# EAGLE board PCA9548A QT Board (EAGLE 9.6.2)
REV: A
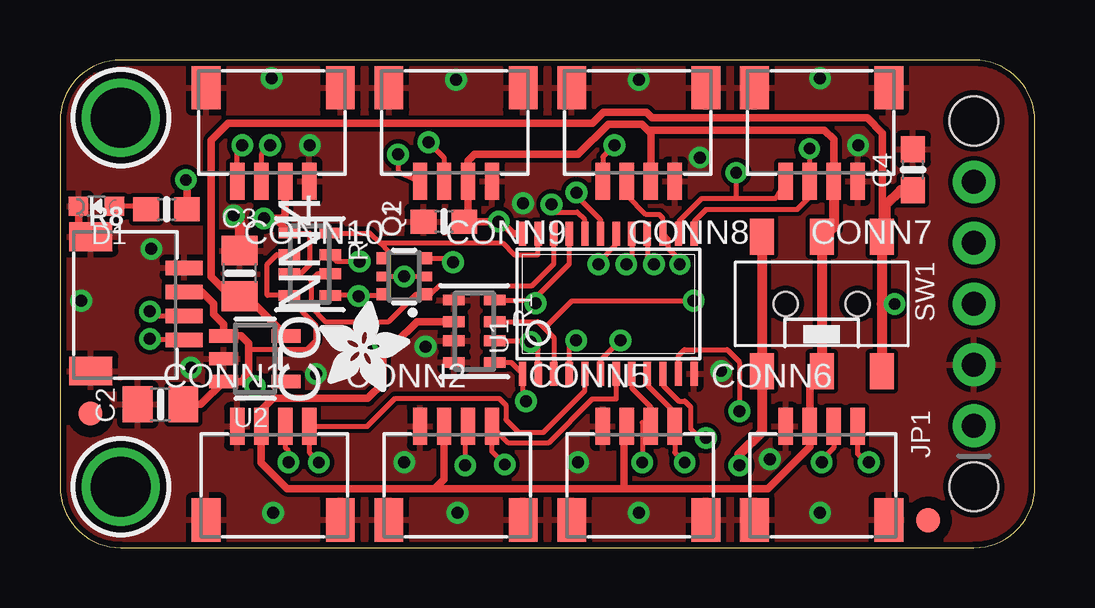
[diagram p0: board, top side]
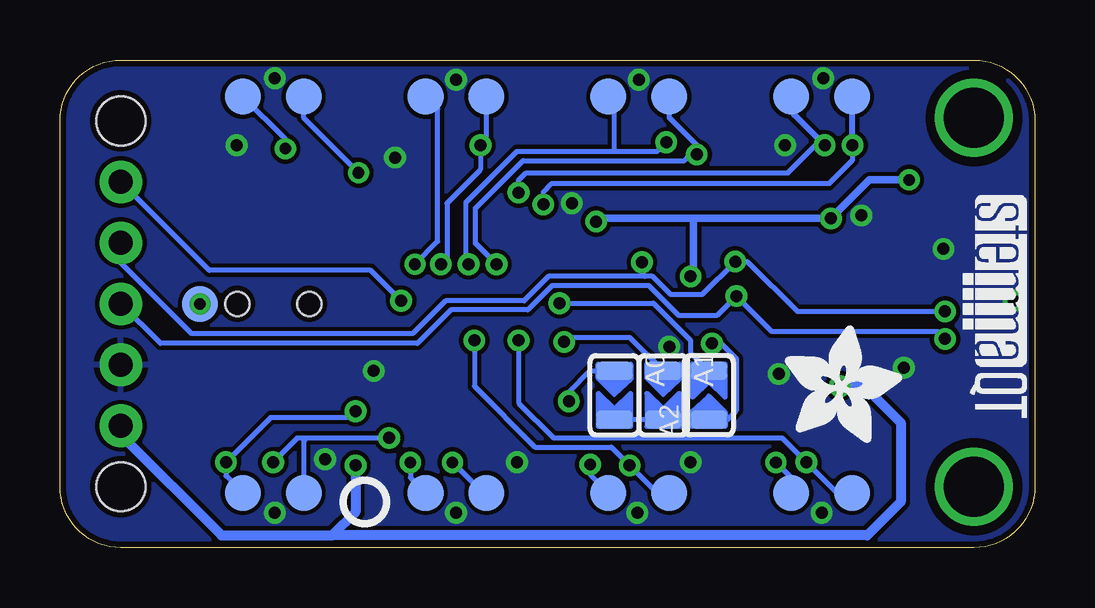
[diagram p1: board, bottom side, seen from below]

Size 40.64 x 20.32 mm. Coordinates in mm from the lower left corner, seen from the top.
Outline: 0,17.78 0,2.54 arc90 2.54,0 38.1,0 arc90 40.64,2.54 40.64,17.78 arc90 38.1,20.32 2.54,20.32 arc90 0,17.78
Copper layers (1*16): Top 0.035mm / dielectric 1.5mm / Bottom 0.035mm
Design rules "adafruit 7-7": minimum track width 7mil, minimum drill 15.5mil, track to track 7mil, track to pad 7mil, pad to pad 7mil, via to via 7mil, smd to smd 7mil, copper to edge 10mil, drill to drill 8mil, minimum pad ring 7mil, minimum via ring 8mil, stop-mask expansion 2mil, vias tented up to drill 20mil, thermal gap 10mil
Net classes: 1 highpower: width 0.305 mm, drill 0.483 mm; 2 lowpower: width 0.254 mm, drill 0.483 mm
Holes 2.03 mm at 38.1,17.78 38.1,2.54

## Footprints (pad centres in the part's own frame; a part is rotated, then mirrored left to right if it is on the bottom)
SOLDERJUMPER_ARROW_NOPASTE = smd 0.762 x 1.524: 1 -1.016,0; 2 1.016,0
0603-NO = smd 1.075 x 1: 1 -0.85,0; 2 0.85,0
0805-NO = smd 1.24 x 1.5: 1 -0.95,0; 2 0.95,0
JST_SH4 = smd 0.6 x 1.55: 1 -1.5,2.006; 2 -0.5,2.006; 3 0.5,2.006; 4 1.5,2.006 | smd 1.2 x 1.8: MT1 -2.8,-1.894; MT2 2.8,-1.894
CHIPLED_0603_NOOUTLINE = smd 0.8 x 0.8: A 0,-0.75; C 0,0.75
FIDUCIAL_1MM = smd 1 x 1: 1 0,0
1X05_ROUND_70 = drill 1 pad 1.778: 1 -5.08,0; 2 -2.54,0; 3 0,0; 4 2.54,0; 5 5.08,0
SOT363 = smd 0.5 x 0.5: 1 -0.75,-0.9; 3 0.75,-0.9; 4 0.75,0.9; 6 -0.75,0.9 | smd 0.4 x 0.5: 2 0,-0.9; 5 0,0.9
RESPACK_4X0603 = smd 0.45 x 0.9: 1 -1.3,-0.85; 2 -0.4,-0.85; 3 0.4,-0.85; 4 1.3,-0.85; 5 1.3,0.85; 6 0.4,0.85; 7 -0.4,0.85; 8 -1.3,0.85
EG1390 = smd 1 x 1.5: O1 -2.5,2.8; O2 -2.5,-2.8; P1 0,2.8; P2 0,-2.8; S1 2.5,2.8; S2 2.5,-2.8 | hole 1: 1.5,0; -1.5,0
TESTPOINT_ROUND_1.5MM_NO = smd 1.5 x 1.5: P$1 0,0
TSSOP24 = smd 0.305 x 0.991: 1 -3.575,-2.918; 2 -2.925,-2.918; 3 -2.275,-2.918; 4 -1.625,-2.918; 5 -0.975,-2.918; 6 -0.325,-2.918; 7 0.325,-2.918; 8 0.975,-2.918; 9 1.625,-2.918; 10 2.275,-2.918; 11 2.925,-2.918; 12 3.575,-2.918; 13 3.575,2.918; 14 2.925,2.918; 15 2.275,2.918; 16 1.625,2.918; 17 0.975,2.918; 18 0.325,2.918; 19 -0.325,2.918; 20 -0.975,2.918; 21 -1.625,2.918; 22 -2.275,2.918; 23 -2.925,2.918; 24 -3.575,2.918
SOT23-5 = smd 0.55 x 1.2: 1 -0.95,-1.3; 2 0,-1.3; 3 0.95,-1.3; 4 0.95,1.3; 5 -0.95,1.3
MOUNTINGHOLE_2.5_PLATED = drill 2.5 pad 3.2: P$1 0,0

## Placement (x,y rotation side)
A0  [SOLDERJUMPER_ARROW_NOPASTE]  17.53,6.35 270 bottom
A1  [SOLDERJUMPER_ARROW_NOPASTE]  15.49,6.35 270 bottom
A2  [SOLDERJUMPER_ARROW_NOPASTE]  13.59,6.35 90 bottom
C1  1uF  [0603-NO]  16,13.59 180 top
C2  10uF  [0805-NO]  4.19,5.97 180 top
C3  10uF  [0805-NO]  7.49,11.43 90 top
C4  0.1uF  [0603-NO]  35.56,15.75 90 top
CONN1  STEMMA_I2C_QT  [JST_SH4]  8.89,3.05 0 top
CONN2  STEMMA_I2C_QT  [JST_SH4]  16.51,3.05 0 top
CONN4  STEMMA_I2C_QT  [JST_SH4]  3.17,10.16 270 top
CONN5  STEMMA_I2C_QT  [JST_SH4]  24.13,3.05 0 top
CONN6  STEMMA_I2C_QT  [JST_SH4]  31.75,3.05 0 top
CONN7  STEMMA_I2C_QT  [JST_SH4]  31.75,17.27 180 top
CONN8  STEMMA_I2C_QT  [JST_SH4]  24.13,17.27 180 top
CONN9  STEMMA_I2C_QT  [JST_SH4]  16.51,17.27 180 top
CONN10  STEMMA_I2C_QT  [JST_SH4]  8.89,17.27 180 top
D1  GREEN  [CHIPLED_0603_NOOUTLINE]  1.52,14.22 90 top
FID2  FIDUCIAL_1MM  [FIDUCIAL_1MM]  1.27,5.59 0 top
FID4  FIDUCIAL_1MM  [FIDUCIAL_1MM]  36.2,1.14 0 top
JP1  [1X05_ROUND_70]  38.1,10.16 90 top
PLABEL0  [PLABEL0]  39.75,5.08 90 top
PLABEL1  [PLABEL1]  39.88,7.62 90 top
PLABEL2  [PLABEL2]  39.75,9.91 90 top
PLABEL3  [PLABEL3]  39.75,12.7 90 top
PLABEL4  [PLABEL4]  39.75,15.75 90 top
PLABEL5  [PLABEL5]  0.19,14.99 0 top
PLABEL6  [PLABEL6]  30.48,13.08 90 top
PLABEL7  [PLABEL7]  33.02,13.08 90 top
PLABEL8  [PLABEL8]  11.56,14.73 0 top
PLABEL9  [PLABEL9]  14.1,14.73 0 top
PLABEL10  [PLABEL10]  26.8,14.73 0 top
PLABEL11  [PLABEL11]  29.08,14.73 0 top
PLABEL12  [PLABEL12]  11.56,5.71 0 top
PLABEL13  [PLABEL13]  14.22,5.71 0 top
PLABEL14  [PLABEL14]  26.92,5.59 0 top
PLABEL15  [PLABEL15]  29.34,5.59 0 top
PLABEL16  [PLABEL16]  30.48,7.3 90 top
PLABEL17  [PLABEL17]  33.02,7.24 90 top
PLABEL18  [PLABEL18]  27.3,10.16 90 top
PLABEL19  [PLABEL19]  36.2,10.16 90 top
PLABEL20  [PLABEL20]  18.48,8.19 0 bottom
PLABEL21  [PLABEL21]  16.32,8.19 0 bottom
PLABEL22  [PLABEL22]  14.48,8.19 0 bottom
PLABEL23  [PLABEL23]  27.94,6.1 0 bottom
PLABEL24  [PLABEL24]  20.26,14.35 0 bottom
Q2  BSS138  [SOT363]  14.35,11.3 90 top
R1  10K Pack  [RESPACK_4X0603]  17.27,9.02 270 top
R7  10K Pack  [RESPACK_4X0603]  10.41,11.81 270 top
R8  10K  [0603-NO]  4.45,14.1 180 top
SW1  AYZ0202AGRLC  [EG1390]  31.75,10.16 180 top
TP1  [TESTPOINT_ROUND_1.5MM_NO]  7.62,18.8 0 bottom
TP2  [TESTPOINT_ROUND_1.5MM_NO]  10.16,18.8 0 bottom
TP3  [TESTPOINT_ROUND_1.5MM_NO]  15.24,18.8 0 bottom
TP4  [TESTPOINT_ROUND_1.5MM_NO]  17.78,18.8 0 bottom
TP5  [TESTPOINT_ROUND_1.5MM_NO]  22.86,18.8 0 bottom
TP6  [TESTPOINT_ROUND_1.5MM_NO]  25.4,18.8 0 bottom
TP7  [TESTPOINT_ROUND_1.5MM_NO]  33.02,18.8 0 bottom
TP8  [TESTPOINT_ROUND_1.5MM_NO]  30.48,18.8 0 bottom
TP9  [TESTPOINT_ROUND_1.5MM_NO]  33.02,2.29 90 bottom
TP10  [TESTPOINT_ROUND_1.5MM_NO]  30.48,2.29 90 bottom
TP11  [TESTPOINT_ROUND_1.5MM_NO]  25.4,2.29 90 bottom
TP12  [TESTPOINT_ROUND_1.5MM_NO]  22.86,2.29 90 bottom
TP13  [TESTPOINT_ROUND_1.5MM_NO]  17.78,2.29 90 bottom
TP14  [TESTPOINT_ROUND_1.5MM_NO]  15.24,2.29 90 bottom
TP15  [TESTPOINT_ROUND_1.5MM_NO]  10.16,2.29 90 bottom
TP16  [TESTPOINT_ROUND_1.5MM_NO]  7.62,2.29 90 bottom
TP17  [TESTPOINT_ROUND_1.5MM_NO]  34.8,10.16 0 bottom
U1  xCA9548APWR  [TSSOP24]  22.86,10.16 0 top
U2  AP2112K-3.3  [SOT23-5]  8.13,7.87 270 top
U$5  [ADAFRUIT_5MM]  10.41,4.38 0 bottom
U$19  MOUNTINGHOLE2.5  [MOUNTINGHOLE_2.5_PLATED]  2.54,17.91 0 top
U$22  MOUNTINGHOLE2.5  [MOUNTINGHOLE_2.5_PLATED]  2.54,2.54 0 top
U$28  [ADAFRUIT_3.5MM]  10.79,6.48 0 top
U$29  [PCBFEAT-REV-040]  27.94,1.91 0 bottom
U$31  [STEMMAQT]  2.98,14.67 270 bottom

## Library data of the parts
A0 A1 A2 FID2 FID4 = microbuilder; BOM: EXCLUDE
C1-C4 JP1 R1 R7 R8 TP1-TP17 U1 U$5 U$28 U$29 = microbuilder
CONN1 CONN2 CONN4-CONN10 = adafruit_electromech; LCSC: C2845363
D1 = microbuilder; ROT: 270
PLABEL0 PLABEL1-PLABEL24 = pinguin
Q2 = microbuilder; JLC_ROTATION: 270
SW1 = adafruit_electromech; LCSC: C2837066
U2 = adafruit_power; JLC_ROTATION: 0
U$19 U$22 = adafruit_electromech; BOM: EXCLUDE
U$31 = silks

## Nets
0SCL: CONN1.4 TP15.P$1 U1.5
0SDA: CONN1.3 TP16.P$1 U1.4
1SCL: CONN2.4 TP13.P$1 U1.7
1SDA: CONN2.3 TP14.P$1 U1.6
2SCL: CONN5.4 TP11.P$1 U1.9
2SDA: CONN5.3 TP12.P$1 U1.8
3.3V [lowpower]: C3.1 C4.1 SW1.O1 SW1.O2 TP17.P$1 U2.5
3SCL: CONN6.4 TP9.P$1 U1.11
3SDA: CONN6.3 TP10.P$1 U1.10
4SCL: CONN7.4 TP8.P$1 U1.14
4SDA: CONN7.3 TP7.P$1 U1.13
5SCL: CONN8.4 TP5.P$1 U1.16
5SDA: CONN8.3 TP6.P$1 U1.15
6SCL: CONN9.4 TP3.P$1 U1.18
6SDA: CONN9.3 TP4.P$1 U1.17
7SCL: CONN10.4 TP1.P$1 U1.20
7SDA: CONN10.3 TP2.P$1 U1.19
A0: A0.1 R1.5 U1.1
A1: A1.1 R1.6 U1.2
A2: A2.2 R1.8 U1.21
GND: C1.2 C2.2 C3.2 C4.2 CONN1.1 CONN1.MT1 CONN1.MT2 CONN2.1 CONN2.MT1 CONN2.MT2 CONN4.1 CONN4.MT1 CONN4.MT2 CONN5.1 CONN5.MT1 CONN5.MT2 CONN6.1 CONN6.MT1 CONN6.MT2 CONN7.1 CONN7.MT1 CONN7.MT2 CONN8.1 CONN8.MT1 CONN8.MT2 CONN9.1 CONN9.MT1 CONN9.MT2 CONN10.1 CONN10.MT1 CONN10.MT2 D1.C JP1.2 R1.1 R1.3 R1.4 U1.12 U2.2
N$1: D1.A R8.2
RESET: JP1.5 R1.7 U1.3
SCL: CONN4.4 JP1.3 Q2.6 R7.5
SCL_IO: Q2.1 R7.6 U1.22
SDA: CONN4.3 JP1.4 Q2.3 R7.7
SDA_IO: Q2.4 R7.8 U1.23
VCC: C2.1 CONN4.2 JP1.1 R7.2 R7.4 SW1.S1 SW1.S2 U2.1 U2.3
VCCIO: A0.2 A1.2 A2.1 C1.1 CONN1.2 CONN2.2 CONN5.2 CONN6.2 CONN7.2 CONN8.2 CONN9.2 CONN10.2 Q2.2 Q2.5 R1.2 R7.1 R7.3 R8.1 SW1.P1 SW1.P2 U1.24

## Tracks (layer width: path | path; a pad name or v marks a point on that pad's centre or on a via)
0SCL  (via drill 0.48)
  Top 0.203: U1.5 21.89,6.53 20.15,4.8 19.12,4.8 18.59,5.33 18.59,5.95 18.31,6.22 13.97,6.22 12.8,5.05 10.41,5.05 | CONN1.4 10.41,5.05 | v10.79,3.56 10.41,3.94 10.41,5.05
  Bottom 0.203: TP15.P$1 10.16,2.92 v10.79,3.56
0SDA  (via drill 0.5)
  Top 0.203: U1.4 21.23,8.35 v21.52,8.64 | v9.53,3.56 9.53,4.03 9.39,4.17 CONN1.3
  Bottom 0.203: v21.52,8.64 21.52,6.03 20.07,4.57 10.54,4.57 v9.53,3.56 8.26,2.29 TP16.P$1
1SCL  (via drill 0.48)
  Top 0.203: U1.7 23.18,6.18 22.18,6.18 20.36,4.36 18.71,4.36 CONN2.4 18.01,4 v18.54,3.47
  Bottom 0.203: TP13.P$1 18.54,3.05 v18.54,3.47
1SDA  (via drill 0.5)
  Top 0.203: U1.6 22.54,7.8 v23.37,8.64 | CONN2.3 16.89,5.44 v16.89,3.43
  Bottom 0.203: v23.37,8.64 23.37,6.73 20.83,4.19 17.65,4.19 v16.89,3.43 15.75,2.29 TP14.P$1
2SCL  (via drill 0.48)
  Top 0.203: U1.9 24.48,6.78 25.63,5.63 CONN5.4 25.63,3.96 v26.04,3.56
  Bottom 0.203: v26.04,3.56 26.04,2.92 TP11.P$1
2SDA  (via drill 0.48)
  Top 0.203: U1.8 23.84,6.64 24.63,5.85 CONN5.3 24.28,5.21 v24.28,3.56
  Bottom 0.203: v24.28,3.56 23.01,2.29 TP12.P$1
3.3V  (via drill 0.48)
  Top 0.254: 34.25,10.16 TP17.P$1
  Top 0.305: U2.5 7.77,10.48 C3.1 7.11,10.48 6.31,11.28 6.31,16.98 7.01,17.67 22.2,17.67 22.66,18.14 24.46,18.14 24.69,17.91 33.66,17.91 34.29,17.27 34.29,13.11 34.41,12.99
  Top 0.406: SW1.O1 34.25,10.16 SW1.O2 34.41,12.99 34.41,14.26 35.05,14.9 C4.1
  Bottom 0.254: TP17.P$1 34.99,10.16
  other vias: 34.8,10.16
3SCL  (via drill 0.5)
  Top 0.203: v33.72,3.56 33.6,3.56 33.25,3.91 CONN6.4 | U1.11 25.79,8.01 26.04,8.26 27.81,8.26 28.32,7.75 v28.32,5.69
  Bottom 0.203: v28.32,5.69 28.57,5.43 31.85,5.43 v33.72,3.56 33.72,2.99 TP9.P$1
3SDA  (via drill 0.5)
  Top 0.203: U1.10 25.14,6.77 25.8,6.11 26.05,6.11 26.29,5.87 26.29,4.95 26.67,4.57 v26.92,4.57 | CONN6.3 32.25,4.17 31.75,3.67 v31.75,3.56
  Bottom 0.203: 30.35,4.57 30.73,4.57 v31.75,3.56 | 30.35,4.57 v26.92,4.57 | 30.35,4.57 30.48,4.45 TP10.P$1
4SCL  (via drill 0.48)
  Top 0.203: U1.14 25.79,13.58 26.76,14.55 28.19,14.55 | CONN7.4 29.84,14.55 28.19,14.55 | 28.19,14.55 v28.19,15.62
  Bottom 0.203: v28.19,15.62 30.48,17.91 TP8.P$1
4SDA  (via drill 0.48)
  Top 0.203: U1.13 26.43,13.59 26.95,14.1 30.73,14.1 31.25,14.61 CONN7.3 v31.25,16.62 v31.24,16.62
  Bottom 0.203: v31.24,16.62 31.24,17.02 TP7.P$1
5SCL  (via drill 0.5)
  Top 0.203: U1.16 24.48,12.09 v24.77,11.81 | v23.11,16.76 22.63,16.28 CONN8.4
  Bottom 0.203: v24.77,11.81 24.64,11.81 24.51,11.94 24.51,14.35 23.11,15.75 v23.11,16.76 22.86,17.02 TP5.P$1
5SDA  (via drill 0.48)
  Top 0.203: CONN8.3 23.63,14.69 24.44,13.88 24.98,13.88 25.14,13.73 U1.15 25.35,12.86 25.35,12.47 25.84,11.98 v25.84,11.81
  Bottom 0.203: v25.84,11.81 24.89,12.76 24.89,18.29 TP6.P$1
6SCL  (via drill 0.5)
  Top 0.203: U1.18 23.18,12.64 22.44,11.9 v22.44,11.81 | v14.1,16.38 14.1,15.67 CONN9.4
  Bottom 0.203: v22.44,11.81 23.33,12.7 23.33,14.13 21.34,16.13 14.61,16.13 14.35,16.38 v14.1,16.38 14.1,16.76 15.24,17.91 TP3.P$1
6SDA  (via drill 0.5)
  Top 0.203: U1.17 23.84,12.04 v23.61,11.81 | v15.37,16.89 16.01,16.25 CONN9.3
  Bottom 0.203: v23.61,11.81 23.73,11.94 23.73,14.37 21.59,16.51 17.53,16.51 | 17.53,16.51 15.75,16.51 v15.37,16.89 | 17.53,16.51 17.53,18.67 TP4.P$1
7SCL  (via drill 0.5)
  Top 0.203: CONN10.4 7.39,16.55 v7.6,16.76 | v20.49,14.3 20.49,13.99 21.56,13.99 21.89,13.66 U1.20
  Bottom 0.203: v7.6,16.76 7.6,16.15 8.58,15.16 20.14,15.16 20.49,14.81 v20.49,14.3
  Bottom 0.254: v7.6,16.76 7.6,18.78 TP1.P$1
7SDA  (via drill 0.5)
  Top 0.203: v8.76,16.76 8.39,16.39 CONN10.3 | v21.53,14.79 21.53,14.66 22.54,13.66 U1.19
  Bottom 0.203: v21.53,14.79 21.53,15.3 21.21,15.62 10.29,15.62 8.95,16.95 v8.76,16.76
  Bottom 0.254: v8.76,16.76 10.03,18.03 TP2.P$1
A0  (via drill 0.5)
  Top 0.203: R1.5 18.81,7.72 U1.1 19.29,6.24 v19.43,6.1
  Bottom 0.203: v19.43,6.1 19.43,6.48 18.54,7.37 A0.1
A1  (via drill 0.5)
  Top 0.203: R1.6 19.58,8.62 v19.62,8.57 19.93,8.26 U1.2
  Bottom 0.203: v19.62,8.57 19.43,8.76 16.89,8.76 A1.1
A2  (via drill 0.5)
  Top 0.203: R1.8 19.69,10.32 | 19.69,10.32 19.73,10.32 21.23,11.82 U1.21 | 19.69,10.32 v19.82,10.19
  Bottom 0.203: v19.82,10.19 15.9,10.19 14.35,8.64 14.35,8.13 A2.2
GND  (via drill 0.5)
  Top 0.305: D1.C 0.77,13.22 0.76,13.21 1.28,12.69 CONN4.MT1
  Top 0.406: v7.24,13.84 7.49,13.59 C3.2
  other vias: 14.35,3.56 21.59,3.56 29.59,3.68 15.24,8.38 27.56,7.37 33.27,16.76 26.67,16.26 10.41,16.76 19.3,14.35 5.46,7.49 10.67,7.24 0.89,10.29 3.81,12.45 31.69,19.56 24.13,19.49 16.51,19.49 8.83,19.56 8.89,1.46 16.57,1.46 24.13,1.46 31.69,1.46
  pour Top: 0,0 0,20.32 40.64,20.32 40.64,0
  pour Bottom: 0,0 0,20.32 40.64,20.32 40.64,0
N$1
  Top 0.203: R8.2 3.47,14.22 D1.A
RESET  (via drill 0.5)
  Top 0.203: R1.7 19.92,9.42 20.19,9.14 | U1.3 20.59,8.75 20.19,9.14 | v26.42,10.29 21.34,10.29 20.19,9.14
  Bottom 0.203: v26.42,10.29 27.69,11.56 34.42,11.56 JP1.5
SCL  (via drill 0.5)
  Top 0.203: R7.5 12.42,10.51 v12.45,10.48 12.47,10.51 13.41,10.51 Q2.6 | CONN4.4 3.79,8.66 v3.75,8.7
  Bottom 0.203: v3.75,8.7 4.06,9.02 10.98,9.02 v12.45,10.48 13.26,9.67 14.84,9.67 16.1,10.92 20.12,10.92 21.14,9.91 24.34,9.91 25.74,8.51 36.45,8.51 JP1.3
SCL_IO
  Top 0.203: U1.22 20.59,11.82 19.68,10.92 15.82,10.92 15.45,10.55 Q2.1 14.84,10.55 13.7,9.42 11.05,9.42 10.46,10.01 10.46,11.14 10.73,11.41 R7.6
SDA  (via drill 0.5)
  Top 0.203: R7.7 11.55,11.92 12.24,11.92 v12.49,11.92 | v3.75,9.84 3.93,9.66 CONN4.3 | Q2.3 15.97,12.05 16.13,11.89 v16.38,11.89 | v12.49,11.92
  Bottom 0.203: v3.75,9.84 9.91,9.84 11.99,11.92 v12.49,11.92 13.87,10.54 15.18,10.54 15.94,11.3 16.26,11.3 | v16.38,11.89 16.38,11.43 16.26,11.3 | 16.26,11.3 20.28,11.3 21.3,10.29 24.56,10.29 25.93,8.91 35.14,8.91 38.1,11.87 JP1.4
SDA_IO
  Top 0.203: Q2.4 13.72,12.32 13.34,12.7 | 13.34,12.7 18.44,12.7 18.92,12.21 19.93,12.21 U1.23 | R7.8 12.92,13.11 13.34,12.7
VCC  (via drill 0.5)
  Top 0.203: R7.2 9.04,12.21 8.64,11.81 8.64,10.51 R7.4 9.56,10.37 10.66,9.27 10.66,8.63 10.29,8.26 7.87,8.26
  Top 0.305: CONN4.2 5.91,10.66 6.41,10.16 6.41,9.72 6.83,9.31 U2.1 7.56,8.82 7.87,8.51 7.87,8.26 7.87,7.24 7.75,7.11 7.56,6.92 U2.3 5.87,5.97 C2.1
  Top 0.406: v8.13,6.73 7.75,7.11 | SW1.S2 SW1.S1 29.25,4.82 28.32,3.89 v28.32,3.43
  Bottom 0.406: JP1.1 38.1,4.7 33.91,0.51 29.29,0.51 | v8.13,6.73 7.11,6.73 5.59,5.21 5.59,1.91 6.99,0.51 29.29,0.51 | v28.32,3.43 28.32,1.48 29.29,0.51
VCCIO  (via drill 0.48, 0.5)
  Top 0.203: Q2.5 v14.35,11.3 Q2.2 | R7.3 10.03,11.41 10.41,11.79 10.41,13.11 R7.1
  Top 0.305: U1.24 18.89,13.08 18.38,13.59 v18.29,13.59 C1.1 17.01,13.75 CONN9.2 17.01,16.12 17.27,16.38 21.59,16.38 22.86,17.65 24.26,17.65 24.64,17.27 | CONN8.2 24.64,17.27 | 24.64,17.27 24.64,17.4 31.87,17.4 32.25,17.02 CONN7.2 | CONN10.2 9.39,13.87 9.24,13.72 v8.5,13.72 8.96,13.72 R7.1 | 15.62,2.46 9.48,2.46 8.39,3.55 CONN1.2 8.39,5.72 8.89,6.22 12.83,6.22 13.46,6.86 v13.46,8.51 13.97,8.51 14.88,9.42 R1.2 | 15.62,2.46 23.5,2.46 | 23.5,2.46 29.51,2.46 31.25,4.2 CONN6.2 31.25,6.73 SW1.P1 | CONN5.2 23.5,5.43 23.5,2.47 23.5,2.46 | CONN2.2 16.01,2.85 15.62,2.46 | v5.25,15.33 5.29,15.28 R8.1
  Top 0.406: CONN7.2 32.25,13.33 SW1.P2 SW1.P1
  Bottom 0.203: A0.2 A1.2 A2.1 12.83,5.33 12.45,5.71 12.45,7.87 13.08,8.51 v13.46,8.51
  Bottom 0.305: v18.29,13.59 18.16,13.72 14.22,13.72 | 14.22,13.72 v8.5,13.72 6.9,15.33 v5.25,15.33 | 14.22,13.72 14.22,11.43 v14.35,11.3

## Text on the board
Pinguin_tBackup: RST | on | 7 | 6 | 5 | 4 | V+ | 3V | SDA | Vlogic | PCA9548A | SCL | V+ | 3V | - | 0 | 1 | 2 | 3 | V+
Pinguin_bBackup: 8-Channel I2C Multiplexer for / STEMMA QT/qwiic. Select / Vin (3-5V) or 3V@500mA out | PCA9548 | A1 | A0 | A2